# EAGLE board Teensy3 based M&M board no routing (EAGLE 6.4)
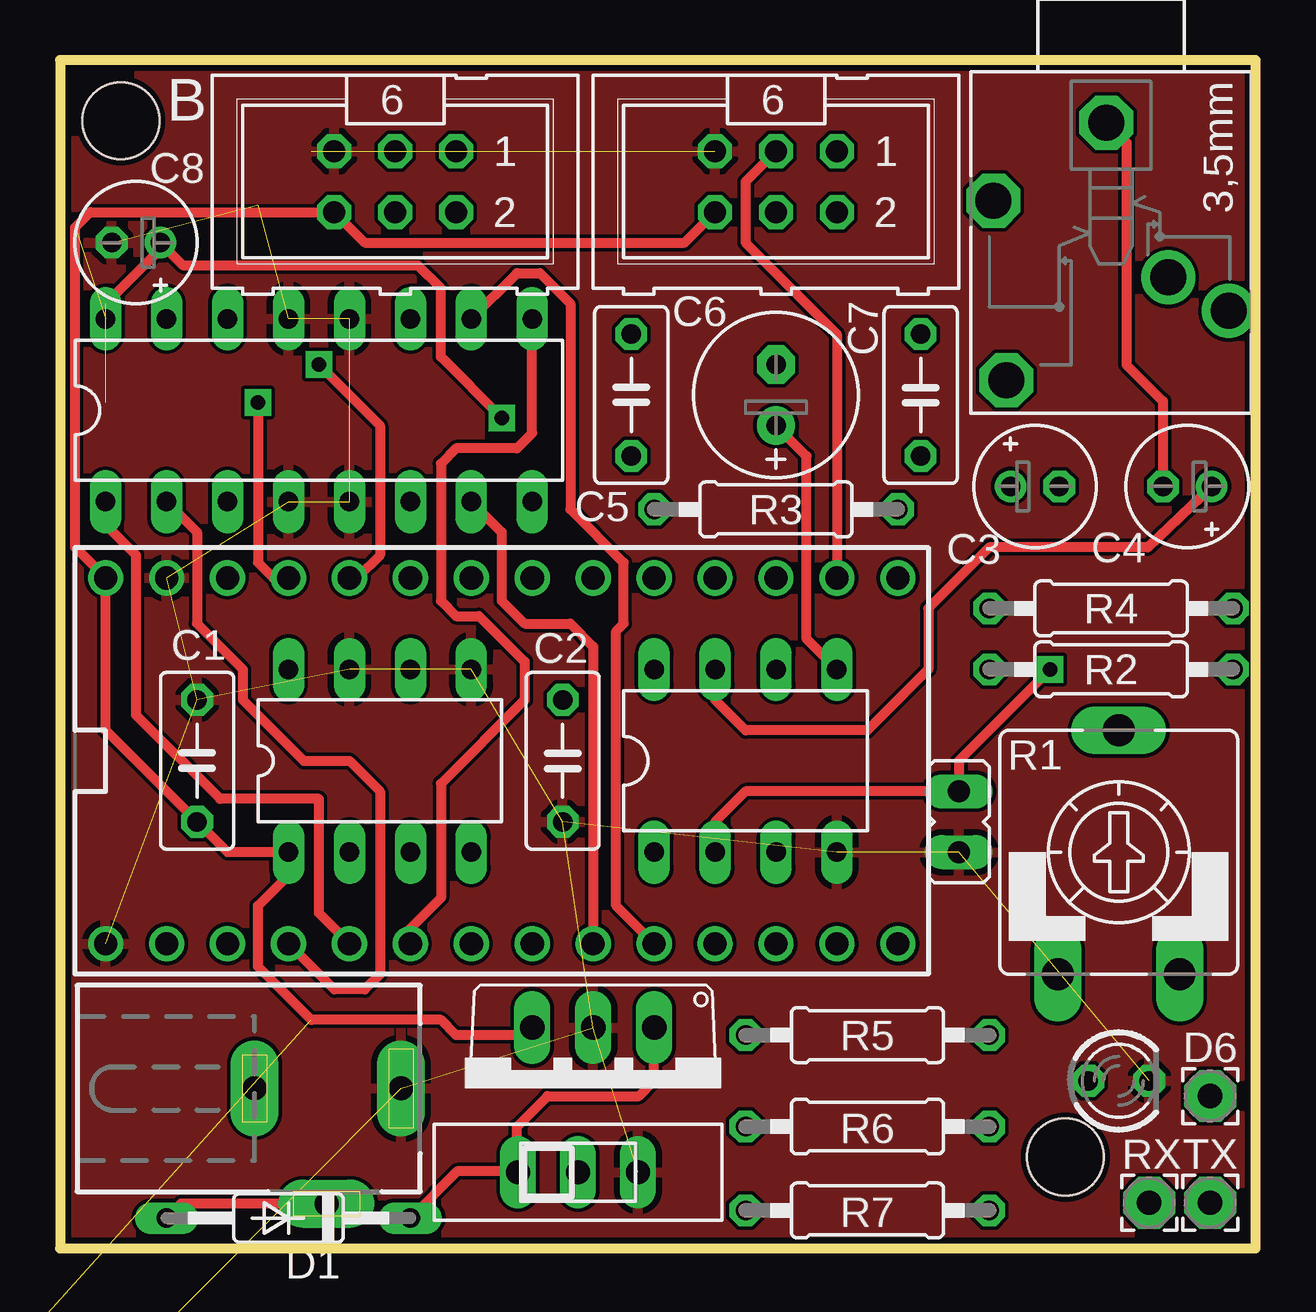
[diagram p0: board, top side]
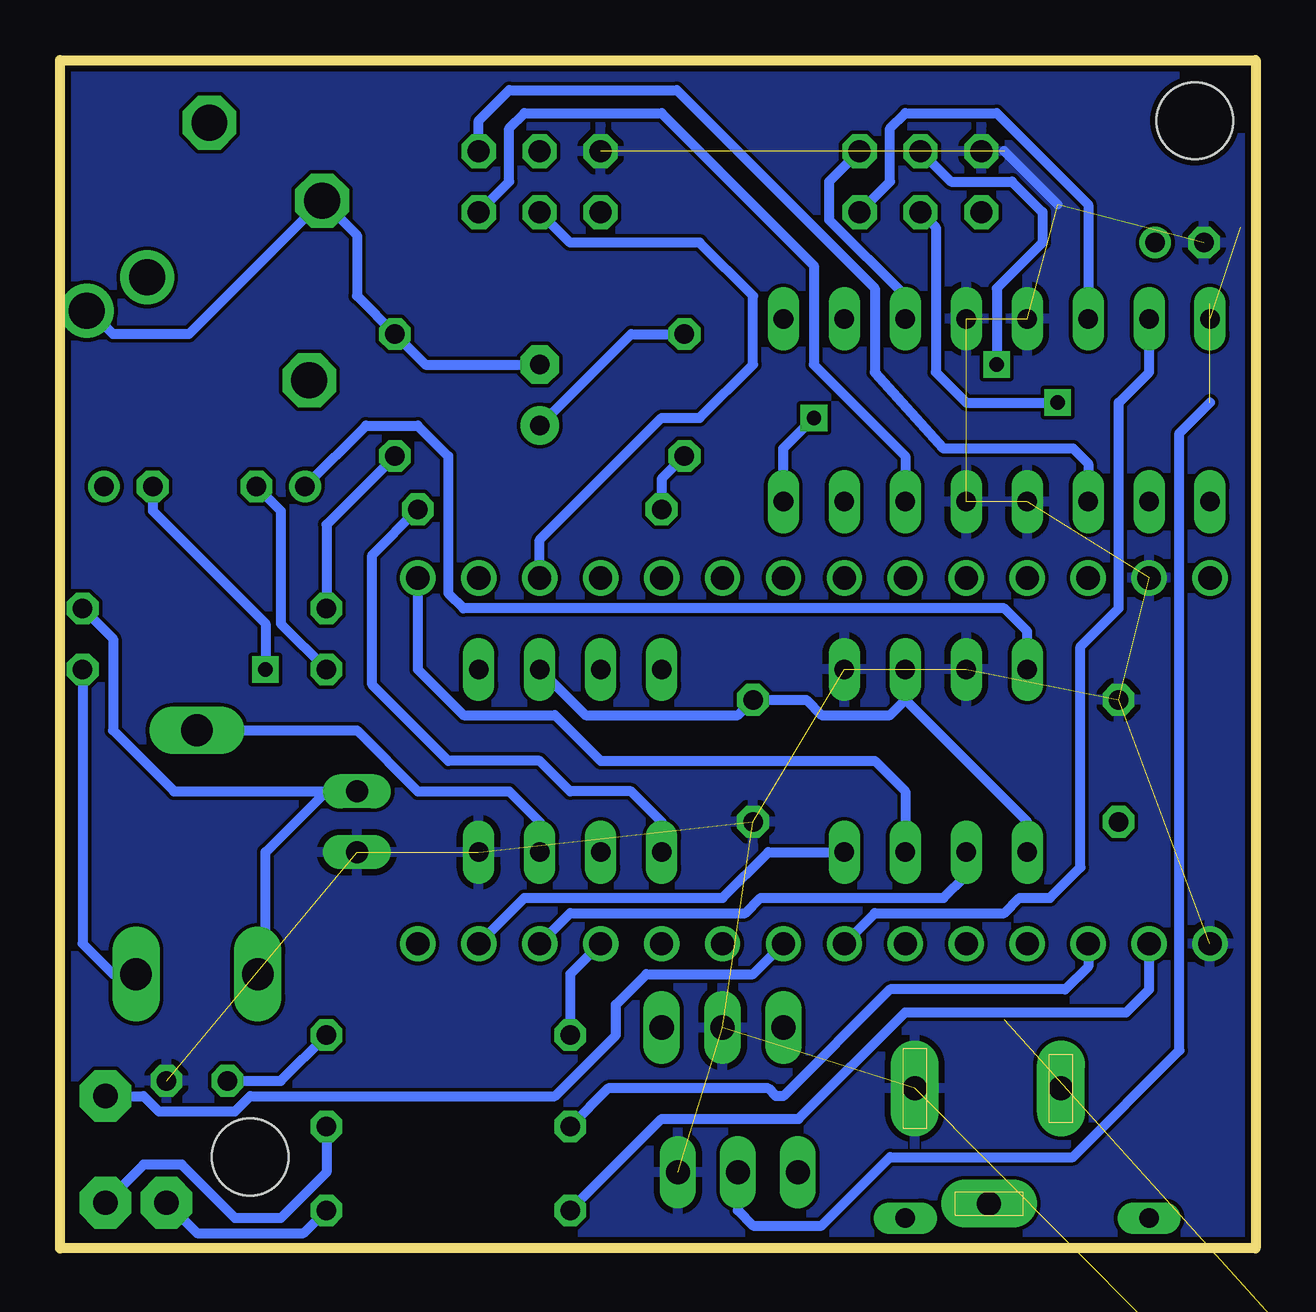
[diagram p1: board, bottom side, seen from below]

Size 49.84 x 49.52 mm. Coordinates in mm from the lower left corner, seen from the top.
Outline: 0,0 49.84,0 49.84,49.52 0,49.52 0,0
Copper layers (1*2*15*16): Top 0.035mm / dielectric 0.2mm / layer 2 0.0175mm / dielectric 1.1mm / layer 15 0.0175mm / dielectric 0.2mm / Bottom 0.035mm
Design rules "SeeedStudio_DRU_no_angle_20130527 *": minimum track width 6mil, minimum drill 12mil, track to track 6mil, track to pad 6mil, pad to pad 6mil, via to via 6mil, smd to smd 0mil, copper to edge 10mil, drill to drill 10mil, minimum pad ring 10mil, minimum via ring 10mil, stop-mask expansion 2mil, vias tented up to drill 25mil, thermal gap 10mil
Net classes: 1 power: width 0.61 mm
Holes 3.2 mm at 2.54,46.99 41.91,3.81

## Footprints (pad centres in the part's own frame; a part is rotated, then mirrored left to right if it is on the bottom)
PG203J = drill 1.499 octagon: 1 -5.004,-0.203; 4 5.74,-4.369; 5 -1.753,-4.902 | drill 1.499: 2 2.845,4.902; 3 1.448,2.388
C050-030X075 = drill 0.813 octagon: 1 -2.54,0; 2 2.54,0
E2-5 = drill 0.813 pad 1.27: + -1.016,0 | drill 0.813 pad 1.27 octagon: - 1.016,0
E2,5-7 = drill 0.813 pad 1.6: + -1.27,0 | drill 0.813 pad 1.6 octagon: - 1.27,0
DO35-10 = drill 0.813 long: A 5.08,0; C -5.08,0
2,15/1,0 = drill 1.016 pad 2.159 octagon: 1 0,0
DIL8 = drill 0.813 long: 1 -3.81,-3.81; 2 -1.27,-3.81; 3 1.27,-3.81; 4 3.81,-3.81; 5 3.81,3.81; 6 1.27,3.81; 7 -1.27,3.81; 8 -3.81,3.81
DIL16 = drill 0.813 long: 1 -8.89,-3.81; 2 -6.35,-3.81; 3 -3.81,-3.81; 4 -1.27,-3.81; 5 1.27,-3.81; 6 3.81,-3.81; 7 6.35,-3.81; 8 8.89,-3.81; 9 8.89,3.81; 10 6.35,3.81; 11 3.81,3.81; 12 1.27,3.81; 13 -1.27,3.81; 14 -3.81,3.81; 15 -6.35,3.81; 16 -8.89,3.81
TO220V = drill 1.016 long: 1 -2.54,-2.54; 2 0,-2.54; 3 2.54,-2.54
DCJ0202 = drill 1 pad 2 long: 1 0,3.1; 2 4.8,0; 3 0,-3
JP1 = drill 0.914 long: 1 0,-1.27; 2 0,1.27
LED3MM = drill 0.813 octagon: A -1.27,0; K 1.27,0
CA9V = drill 1.321 long: A -2.54,-5.08; E 2.54,-5.08; S 0,5.08
0207/10 = drill 0.813 octagon: 1 -5.08,0; 2 5.08,0
GF-126-0159 = drill 1 long: 1 -2.5,0; 2 0,0; 3 2.5,0
ML6 = drill 0.914 octagon: 1 -2.54,-1.27; 2 -2.54,1.27; 3 0,-1.27; 4 0,1.27; 5 2.54,-1.27; 6 2.54,1.27
LM386 = drill 0.813 long: 1 2.54,-2.54; 2 5.08,-2.54; 3 7.62,-2.54; 4 10.16,-2.54; 5 10.16,5.08; 6 7.62,5.08; 7 5.08,5.08; 8 2.54,5.08
TEENSY_3.0_BAREBONES = drill 0.965: 0 -7.62,13.97; 1 -7.62,11.43; 2 -7.62,8.89; 3 -7.62,6.35; 3.3V 7.62,11.43; 4 -7.62,3.81; 5 -7.62,1.27; 6 -7.62,-1.27; 7 -7.62,-3.81; 8 -7.62,-6.35; 9 -7.62,-8.89; 10 -7.62,-11.43; 11 -7.62,-13.97; 12 -7.62,-16.51; 13 7.62,-16.51; 14/A0 7.62,-13.97; 15/A1 7.62,-11.43; 16/A2 7.62,-8.89; 17/A3 7.62,-6.35; 18/A4 7.62,-3.81; 19/A5 7.62,-1.27; 20/A6 7.62,1.27; 21/A7 7.62,3.81; 22/A8 7.62,6.35; 23/A9 7.62,8.89; AGND 7.62,13.97; GND -7.62,16.51; VIN 7.62,16.51

## Placement (x,y rotation side)
AUDIO  PG203J  [PG203J]  43.81,41.91 270 top
C1  100n  [C050-030X075]  5.71,20.32 90 top
C2  100n  [C050-030X075]  20.95,20.32 270 top
C3  2u2  [E2-5]  40.64,31.75 0 top
C4  2u2  [E2-5]  46.99,31.75 180 top
C5  33n  [C050-030X075]  23.81,35.56 90 top
C6  330u  [E2,5-7]  29.84,35.56 90 top
C7  47n  [C050-030X075]  35.88,35.56 270 top
C8  10uF  [E2-5]  3.17,41.91 180 top
C9  100n  [C050-030X075]  -1.27,-6.35 0 top  (outside the outline)
D1  1N4148DO35-10  [DO35-10]  9.53,1.27 180 top
D6  [2,15/1,0]  47.94,6.35 0 top
IC1  MCP4921  [DIL8]  13.34,20.32 0 top
IC2  SN754410PDIP  [DIL16]  10.79,34.92 0 top
IC3  7805TV  [TO220V]  22.23,6.67 180 top
J1  DCJ0202  [DCJ0202]  11.11,6.67 270 top
JP1  [JP1]  37.47,17.78 0 top
LED1  TLLR4400  [LED3MM]  44.13,6.99 0 top
R1  [CA9V]  44.13,16.51 0 top
R2  330K  [0207/10]  43.81,24.13 180 top
R3  10K  [0207/10]  29.84,30.8 0 top
R4  10  [0207/10]  43.81,26.67 0 top
R5  120  [0207/10]  33.66,8.89 180 top
R6  10K  [0207/10]  33.66,5.08 0 top
R7  10K  [0207/10]  33.66,1.59 0 top
RX  [2,15/1,0]  45.4,1.91 0 top
S1  [GF-126-0159]  21.59,3.17 0 top
SV1  [ML6]  29.84,44.45 180 top
SV2  [ML6]  13.97,44.45 180 top
TX  [2,15/1,0]  47.94,1.91 0 top
U$2  LM386  [LM386]  22.23,19.05 0 top
U$3  TEENSY_3.0_BAREBONES  [TEENSY_3.0_BAREBONES]  18.41,20.32 90 top

## Library data of the parts
AUDIO = con-hirschmann
C1-C9 R2-R7 = rcl
D1 = diode
D6 RX TX = wirepad
IC1 = microchip-dac
IC2 = AlexW-Eagle-Libraries
IC3 = linear
J1 = con-jack; OC_FARNELL: unknown; OC_NEWARK: unknown
JP1 = jumper
LED1 = led; MF: VISHAY SEMICONDUCTOR; OC_FARNELL: 1612437
R1 = pot
S1 = videomusik
SV1 SV2 = con-harting-ml; OC_FARNELL: unknown; OC_NEWARK: unknown
U$2 = blushingboy_experimental
U$3 = Teensy3.0

## Nets
3.3V [power]: U$3.3.3V
A0: SV1.3 U$3.14/A0
A1: SV1.4 U$3.15/A1
A2: U$3.16/A2
A3: U$3.17/A3
A4: U$3.18/A4
A5: U$3.19/A5
A6: U$3.20/A6
A7: U$3.21/A7
A8: SV2.3 U$3.22/A8
A9: SV2.4 U$3.23/A9
AGND [power]: AUDIO.1 C4.- JP1.2 R1.A R4.2 U$2.2
AMP_IN: R1.S U$2.3
CS0: IC1.2 U$3.10
D0: R7.1 U$3.0
D1: R6.1 U$3.1
D2: IC2.2 U$3.2
D3: IC2.1 U$3.3
D4: IC2.9 U$3.4
D5: IC2.15 U$3.5
D6: D6.1 U$3.6
D7: IC2.7 U$3.7
D8: IC2.10 U$3.8
D9: R5.2 U$3.9
DAC_OUT: C3.+ IC1.8
DIN: U$3.12
DOUT: IC1.4 U$3.11
GND [power]: C1.2 C2.2 C8.- C9.2 IC1.5 IC1.7 IC2.4 IC2.5 IC2.12 IC2.13 IC3.2 J1.1 JP1.1 LED1.K S1.3 SV1.5 SV2.5 U$2.4 U$3.AGND U$3.GND
MA+: IC2.3 SV1.1
MA-: IC2.6 SV1.2
MB+: IC2.11 SV2.1
MB-: IC2.14 SV2.2
N$1: D1.A J1.2
N$2: R3.2 U$2.1
N$3: C3.- R2.2
N$4: R1.E R2.1
N$5: LED1.A R5.1
N$9: C5.1 R3.1
N$10: C4.+ U$2.7
N$78: C7.2 R4.1
N$84: AUDIO.2 AUDIO.5 C6.- C7.1
N$99: C5.2 C6.+ U$2.5
RX1: R7.2 RX.1
SCK: IC1.3 U$3.13
TX1: R6.2 TX.1
VCC [power]: C1.1 C2.1 C9.1 IC1.1 IC1.6 IC2.16 IC3.3 SV1.6 SV2.6 U$2.6 U$3.VIN
VCC2: C8.+ IC2.8 S1.2
VCC/2: D1.C IC3.1 S1.1

## Tracks (layer width: path | path; a pad name or v marks a point on that pad's centre or on a via)
A0
  Top 0.406: SV1.3 28.57,44.45 28.57,41.91 32.38,38.1 U$3.14/A0
A1
  Bottom 0.406: U$3.15/A1 29.84,29.53 24.77,34.61 23.18,34.61 20.95,36.83 20.95,39.69 23.18,41.91 28.57,41.91 SV1.4
A8  (via drill 0.6)
  Top 0.406: v10.79,36.83 13.34,34.29 13.34,28.89 12.38,27.94 U$3.22/A8
  Bottom 0.406: SV2.3 12.7,44.45 10.16,44.45 8.89,43.18 8.89,41.91 10.79,40.01 v10.79,36.83
A9  (via drill 0.6)
  Top 0.406: v8.26,35.24 8.26,28.57 8.89,27.94 U$3.23/A9
  Bottom 0.406: SV2.4 13.34,42.55 13.34,36.51 12.06,35.24 v8.26,35.24
AGND  (via drill 0.6)
  Top 0.406: v41.27,24.13 37.47,20.32 JP1.2 28.57,19.05 27.3,17.78 U$2.2 | AUDIO.1 44.45,46.08 44.45,36.83 45.97,35.31 C4.-
  Bottom 0.406: R4.2 47.62,25.4 47.62,21.59 45.09,19.05 38.73,19.05 | 38.73,19.05 JP1.2 | R1.A 41.27,11.75 41.27,16.51 38.73,19.05 | v41.27,24.13 41.27,26.04 45.97,30.73 C4.-
AMP_IN
  Bottom 0.406: R1.S 37.47,21.59 34.92,19.05 31.11,19.05 29.84,17.78 U$2.3
CS0
  Bottom 0.406: U$3.10 28.57,13.97 21.27,13.97 20.64,14.61 13.02,14.61 12.06,15.56 IC1.2
D0
  Bottom 0.406: R7.1 24.77,5.4 19.05,5.4 14.61,9.84 5.4,9.84 4.45,10.79 U$3.0
D1
  Bottom 0.406: U$3.1 6.99,11.75 7.94,10.79 15.24,10.79 19.68,6.35 20,6.35 20.32,6.67 26.99,6.67 R6.1
D2
  Top 0.406: IC2.2 5.71,29.84 5.71,26.04 7.62,24.13 7.62,22.86 10.16,20.32 12.06,20.32 13.34,19.05 13.34,11.43 12.7,10.79 11.43,10.79 U$3.2
D3
  Top 0.406: U$3.3 10.79,13.97 10.79,18.73 6.67,18.73 3.17,22.23 3.17,28.89 1.91,30.16 IC2.1
D4
  Top 0.406: U$3.4 14.61,13.34 15.88,14.61 15.88,19.37 19.37,22.86 19.37,24.45 17.46,26.35 16.51,26.35 15.88,26.99 15.88,32.7 16.51,33.34 19.05,33.34 19.68,33.97 IC2.9
D5
  Bottom 0.406: U$3.5 15.88,13.97 10.48,13.97 9.84,14.61 8.57,14.61 7.3,15.88 7.3,25.08 5.71,26.67 5.71,35.24 4.45,36.51 IC2.15
D6
  Bottom 0.406: U$3.6 20.95,11.43 25.4,11.43 26.67,10.16 26.67,8.89 29.21,6.35 41.91,6.35 42.55,5.71 45.72,5.71 46.35,6.35 D6.1
D7
  Top 0.406: IC2.7 18.41,29.84 18.41,26.99 19.37,26.04 21.27,26.04 22.23,25.08 U$3.7
D8
  Top 0.406: IC2.10 19.05,40.64 20,40.64 21.27,39.37 21.27,30.8 23.5,28.57 23.5,26.04 23.18,25.72 23.18,14.29 U$3.8
D9
  Bottom 0.406: U$3.9 28.57,11.43 R5.2
DAC_OUT
  Bottom 0.406: IC1.8 9.53,25.72 10.48,26.67 33.02,26.67 33.66,27.3 33.66,33.02 34.92,34.29 37.08,34.29 C3.+
DOUT
  Bottom 0.406: U$3.11 30.48,14.61 22.23,14.61 20.32,16.51 IC1.4
GND  (20 unrouted)
  Bottom 0.406: 10.48,45.72 8.26,43.5
  pour Bottom: -1.91,-1.27 -1.91,50.8 50.8,50.8 50.8,-1.27
  pour Top: -1.91,50.8 -1.91,-1.27 50.8,-1.27 50.8,50.8
MA+
  Bottom 0.406: SV1.1 32.38,46.99 31.11,48.26 24.13,48.26 15.88,40.01 15.88,36.51 13.02,33.34 7.62,33.34 6.99,32.7 IC2.3
MA-
  Bottom 0.406: SV1.2 31.11,44.45 31.11,46.67 30.48,47.31 24.77,47.31 18.41,40.96 18.41,36.83 14.61,33.02 IC2.6
MB+
  Bottom 0.406: SV2.1 17.78,44.45 17.78,42.86 14.61,39.69 IC2.11
MB-
  Bottom 0.406: SV2.2 15.24,44.45 15.24,46.67 14.61,47.31 10.79,47.31 6.99,43.5 IC2.14
N$1
  Top 0.406: J1.2 5.04,1.87 D1.A
N$2
  Bottom 0.406: U$2.1 24.77,17.78 26.04,19.05 28.57,19.05 29.84,20.32 33.66,20.32 36.83,23.5 36.83,28.89 R3.2
N$3
  Bottom 0.406: C3.- 40.64,30.73 40.64,26.04 R2.2
N$4
  Bottom 0.406: R2.1 48.9,12.7 47.62,11.43 R1.E
N$5
  Bottom 0.406: LED1.A 40.64,6.99 R5.1
N$9
  Bottom 0.406: C5.1 24.77,32.07 R3.1
N$10
  Top 0.406: C4.+ 45.34,29.21 38.73,29.21 36.2,26.67 36.2,24.13 33.66,21.59 28.57,21.59 27.3,22.86 U$2.7
N$78
  Bottom 0.406: C7.2 38.73,30.16 R4.1
N$84
  Bottom 0.406: AUDIO.2 48.59,39.06 47.62,38.1 44.48,38.1 AUDIO.5 37.47,42.22 37.47,39.69 C7.1 34.61,36.83 C6.-
N$99
  Top 0.406: U$2.5 31.11,25.4 31.11,33.02 C6.+
  Bottom 0.406: C6.+ 26.04,38.1 C5.2
RX1
  Bottom 0.406: RX.1 44.13,0.64 39.69,0.64 R7.2
SCK
  Bottom 0.406: U$3.13 34.92,24.13 33.02,22.23 29.21,22.23 27.3,20.32 15.88,20.32 14.61,19.05 IC1.3
TX1
  Bottom 0.406: R6.2 38.73,3.17 40.64,1.27 42.55,1.27 44.77,3.49 46.35,3.49 TX.1
VCC  (2 unrouted)
  Top 0.406: SV1.6 26.04,41.91 12.7,41.91 SV2.6 1.27,43.18 0.64,42.55 0.64,29.21 U$3.VIN 1.91,21.59 C1.1 6.99,16.51 IC1.1 9.53,15.56 8.26,14.29 8.26,11.75 10.48,9.53 15.88,9.53 16.51,8.89 19.37,8.89 IC3.3
  Bottom 0.406: U$2.6 27.94,22.23 21.59,22.23 C2.1 18.73,22.86 18.1,22.23 15.24,22.23 14.61,22.86 | IC1.6 14.61,22.86 | 14.61,22.86 9.53,17.78 IC1.1
VCC2  (via drill 0.6)  (1 unrouted)
  Top 0.406: v18.41,34.61 15.88,37.15 15.88,40.01 14.92,40.96 5.14,40.96 C8.+ 4.19,41.66 1.91,39.37
  Bottom 0.406: S1.2 21.59,1.59 20.95,0.95 18.1,0.95 15.24,3.81 7.62,3.81 3.17,8.26 3.17,33.97 1.91,35.24 | IC2.8 19.68,33.34 v18.41,34.61
VCC/2
  Top 0.406: S1.1 19.05,3.21 | 19.05,3.21 19.05,5.08 20.32,6.35 24.13,6.35 24.77,6.99 IC3.1 | 19.05,3.21 16.55,3.21 D1.C

## Text on the board
tNames: B